# Allegro board PCB_BUN.brd
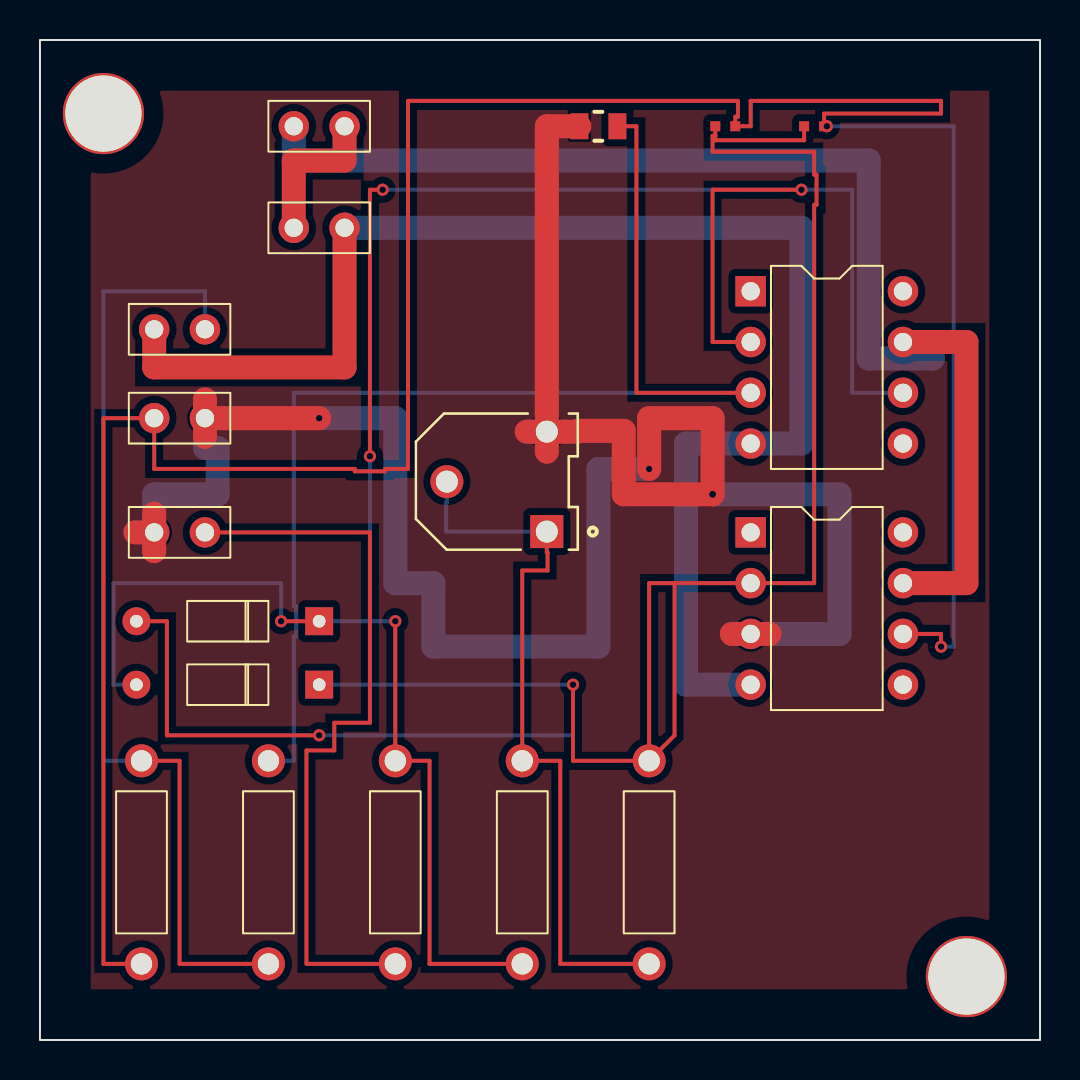
[diagram p0: board, top side]
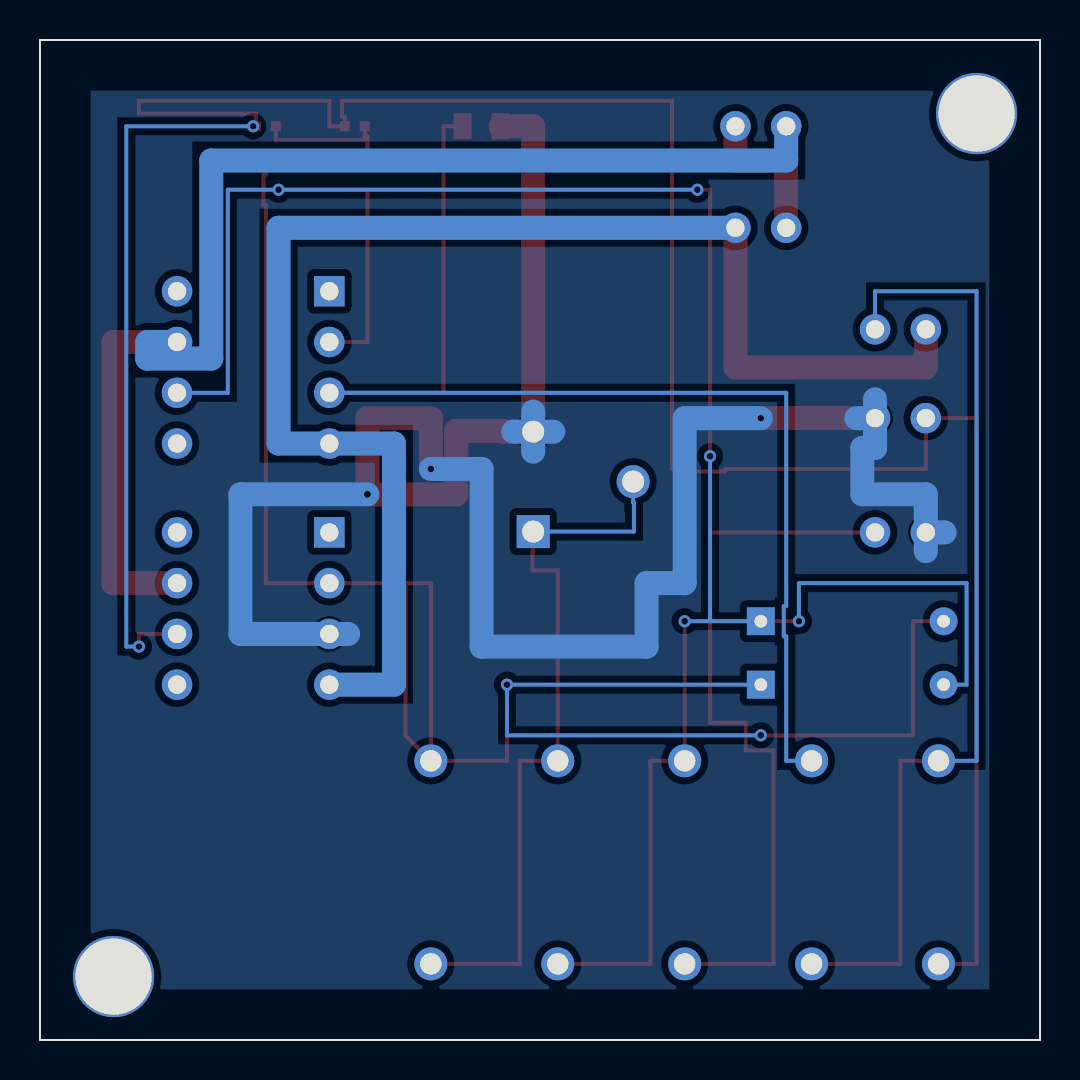
[diagram p1: board, bottom side, seen from below]

Outline 50.04 x 50.04 mm; copper layers: TOP, BOTTOM. Coordinates in mm from the lower left corner of the outline.
Outline path: rectangle 0,0 50.04,50.04

## Design rules (mm)
nets with their own width: min track width 0.201; nets N00174 N00253 N00298 N00306 N00435 N07087 N16595
nets with their own width: min track width 1.201; nets 4 7 GND VCC_BAR

## Placement (name value [footprint] x y rotation side)
BAT1  9V  [JUMPER2]  12.7 45.72 0 top
BAT2  9V  [JUMPER2]  12.7 40.64 0 top
C1  100n  [WCAP-CSST_885382207007]  27.94 45.72 0 top
C2  470n  [WCAP-CSGP_885012105004]  34.29 45.72 0 top
C3  470n  [WCAP-CSGP_885012105004]  38.74 45.72 0 top
D1  1N4148  [DO35]  13.97 20.96 90 top
D2  1N4148  [DO35]  13.97 17.78 90 top
J1  CON2  [JUMPER2]  5.72 35.56 0 top
J2  CON2  [JUMPER2]  5.72 31.12 0 top
M1  100uA  [JUMPER2]  5.72 25.4 0 top
NOREF  -  [unnamed]  3.18 46.35 0 top
NOREF#2  -  [unnamed]  46.36 3.18 0 top
NOREF#3  -  [#2]  -27.94 -25.4 0 top
P1  10K  [TRIM_3306F-1-103]  22.86 27.94 0 top
R1  47K  [RES400]  5.08 3.81 0 top
R2  1M  [RES400]  11.43 3.81 0 top
R3  3.3K  [RES400]  17.78 3.81 0 top
R4  10K  [RES400]  24.13 3.81 0 top
R5  10M  [RES400]  30.48 3.81 0 top
U1  IC1  [DIP8_3]  35.56 37.47 0 top
U2  IC2  [DIP8_3]  35.56 25.4 0 top

## Library data of the parts
BAT1 BAT2 = BATTERY: User Part Number: ***
C1-C3 = CAP NP
D1 D2 = 1N4148
J1 J2 = CON2: User Part Number: ***
M1 = METER A: User Part Number: ***
P1 = POT
R1-R5 = R: Tolerance: ***; User Part Number: ***
U1 U2 = LF356_1: Tolerance: ***; User Part Number: ***

## Footprints (pads in the part's own frame, mm; a bottom-side part is the same pattern mirrored in y, then rotated)
DIP8_3
  rect 1.524x1.524 hole 0.914: 1(0,0)
  round 1.524 hole 0.914: 2(0,-2.54) 3(0,-5.08) 4(0,-7.62) 5(7.62,-7.62) 6(7.62,-5.08) 7(7.62,-2.54) 8(7.62,0)
DO35
  rect 1.397x1.397 hole 0.635: 1(0,0)
  round 1.397 hole 0.635: 2(0,9.144)
JUMPER2
  round 1.524 hole 0.914: 1(0,0) 2(2.54,0)
RES400
  round 1.651 hole 1.067: 1(0,0) 2(0,10.16)
TRIM_3306F-1-103
  rect 1.65x1.65 hole 1.1: 1(2.5,-2.5)
  round 1.65 hole 1.1: 2(-2.5,0) 3(2.5,2.5)
unnamed
  round 4.064 hole 3.81: (0,0)
WCAP-CSGP_885012105004
  rect 0.5x0.5 smd: 1(-0.5,0) 2(0.5,0)
WCAP-CSST_885382207007
  rect 0.9x1.3 smd: 1(-0.95,0) 2(0.95,0)

## Nets
GND: C1.1 J2.2 M1.1 P1.3 U2.3
VCC_BAR: BAT1.2(-) BAT2.1
4: BAT2.2(-) J1.1 U1.4(V-) U2.4(V-)
7: BAT1.1 U1.7 U2.7
N00174: D1.1(CAT) D2.2 R3.2 R4.1 U1.2 U1.6
N00253: C1.2 R2.2 U1.3
N00298: C2.1 C3.1 D1.2 D2.1(CAT) R5.2 U2.2
N00306: C2.2 C3.2 J2.1 R1.1 U2.6
N00435: P1.1 P1.2(WIPER) R4.2 R5.1
N07087: J1.2 R1.2 R2.1
N16595: M1.2 R3.1

Pads without a net: U1 1 5 8; U2 1 5 8

## Via types
v1: diameter 0.61, hole 0.33, TOP to BOTTOM, 33 vias

## Routing (per net, layer and track width the routed paths; a pad name or vN(x,y) marks a point on that pad's centre or on a via; arc(x,y) is an arc through that point)
GND: length 125.1
  TOP w1.201: v1(30.48,28.58) 30.48,31.12 33.66,31.12 v1(33.66,27.31) 29.21,27.31 29.21,30.48 26.91,30.48 26.91,30.44 P1.3 ; J2.2 8.25,32.06 ; J2.2 v1(13.97,31.12) ; J2.2 8.25,30.17 ; 25.36,29.44 P1.3 ; P1.3 25.36,45.72 C1.1 ; P1.3 24.36,30.44 ; 5.72,24.46 v1(5.72,25.4) ; v1(5.72,25.4) 4.77,25.4 ; v1(5.72,25.4) 5.72,26.34 ; 34.62,20.32 U2.3 36.5,20.32
  BOTTOM w1.201: J2.2 8.25,29.63 8.89,29.63 8.89,27.31 5.72,27.31 v1(5.72,25.4) ; J2.2 9.2,31.12 ; J2.2 8.25,32.06 ; v1(5.72,25.4) 4.77,25.4 ; v1(5.72,25.4) 5.72,24.46 ; 34.62,20.32 U2.3 40,20.32 40,27.31 v1(33.66,27.31) ; 24.36,30.44 P1.3 ; P1.3 26.36,30.44 ; P1.3 25.36,29.44 ; P1.3 25.36,31.44 ; v1(30.48,28.58) 27.94,28.58 27.94,19.69 19.69,19.69 19.69,22.86 17.78,22.86 17.78,31.12 v1(13.97,31.12)
VCC_BAR: length 7.6
  TOP w1.201: v1(12.7,40.64) 12.7,44.01 15.24,44.01 BAT1.2
4: length 73.1
  TOP w1.201: v1(15.24,40.64) 15.24,33.66 5.72,33.66 v1(5.72,35.56)
  BOTTOM w1.201: v1(15.24,40.64) 38.1,40.64 38.1,29.84 U1.4 32.33,29.84 32.33,17.78 v1(35.56,17.78)
7: length 64.3
  TOP w1.201: v1(43.18,34.93) 46.36,34.93 46.36,22.86 U2.7
  BOTTOM w1.201: v1(43.18,34.93) 44.67,34.93 44.67,34.1 41.47,34.1 41.47,44.01 12.7,44.01 v1(12.7,45.72)
N00174: length 118.1
  TOP w0.201: v1(17.78,20.96) v1(17.78,13.97) 19.49,13.97 19.49,3.81 R4.1 ; U1.2 33.66,34.93 33.66,42.54 v1(38.1,42.54) ; v1(12.06,20.96) D1.1 ; v1(17.15,42.54) 16.51,42.54 v1(16.51,29.21)
  BOTTOM w0.201: v1(17.15,42.54) v1(38.1,42.54) 40.64,42.54 40.64,32.39 U1.6 ; 16.51,20.96 D1.1 ; 16.51,20.96 v1(16.51,29.21) ; 16.51,20.96 v1(17.78,20.96) ; v1(4.83,17.78) 3.68,17.78 3.68,22.86 12.06,22.86 v1(12.06,20.96)
N00253: length 62.8
  TOP w0.201: C1.2 29.84,45.72 29.84,32.39 U1.3
  BOTTOM w0.201: v1(11.43,13.97) 12.7,13.97 12.7,20.2 12.82,20.2 12.82,21.71 12.7,21.71 12.7,32.39 U1.3
N00298: length 110.7
  TOP w0.201: 31.75,22.86 31.75,15.24 R5.2 ; 31.75,22.86 U2.2 38.74,22.86 38.74,41.79 38.86,41.79 38.86,43.3 38.74,43.3 38.74,44.45 33.66,44.45 33.66,45.24 33.79,45.24 ; 31.75,22.86 30.48,22.86 R5.2 ; v1(26.67,17.78) 26.67,13.97 R5.2 ; C3.1 38.23,45.02 33.79,45.02 33.79,45.24 ; 33.79,45.24 C2.1 ; D1.2 6.35,20.96 6.35,15.25 v1(13.97,15.25)
  BOTTOM w0.201: D2.1 v1(26.67,17.78) 26.67,15.25 v1(13.97,15.25)
N00306: length 137.8
  TOP w0.201: U2.6 45.09,20.32 v1(45.09,19.69) ; C3.2 39.24,46.35 45.09,46.35 45.09,46.99 35.56,46.99 35.56,45.72 C2.2 34.79,46.2 34.93,46.2 34.93,46.99 18.41,46.99 18.41,28.58 17.27,28.58 17.27,28.45 15.75,28.45 15.75,28.58 5.72,28.58 J2.1 3.18,31.12 3.18,3.81 v1(5.08,3.81)
  BOTTOM w0.201: v1(39.37,45.72) 45.72,45.72 45.72,19.69 v1(45.09,19.69)
N00435: length 36.9
  TOP w0.201: R5.1 26.03,3.81 26.03,13.97 v1(24.13,13.97) 24.13,23.5 25.4,23.5 25.4,24.39 25.36,24.39 P1.1
  BOTTOM w0.201: P1.2 20.36,26.89 20.32,26.89 20.32,25.44 P1.1
N07087: length 48.9
  TOP w0.201: R2.1 6.99,3.81 6.99,13.97 R1.2
  BOTTOM w0.201: R1.2 3.18,13.97 3.18,37.47 8.25,37.47 v1(8.25,35.56)
N16595: length 37.5
  TOP w0.201: v1(17.78,3.81) 13.34,3.81 13.34,14.49 14.73,14.49 14.73,15.88 16.51,15.88 16.51,25.4 v1(8.25,25.4)

## Copper pours and planes (outline as drawn; the poured copper is in the pictures)
GND on TOP, BOTTOM: 2.54,2.54 2.54,47.5 47.5,47.5 47.5,2.54

## Text on the board
User.Comments: Voicu Catalin Constantin 423F
